# EAGLE board design (EAGLE 6.5.0)
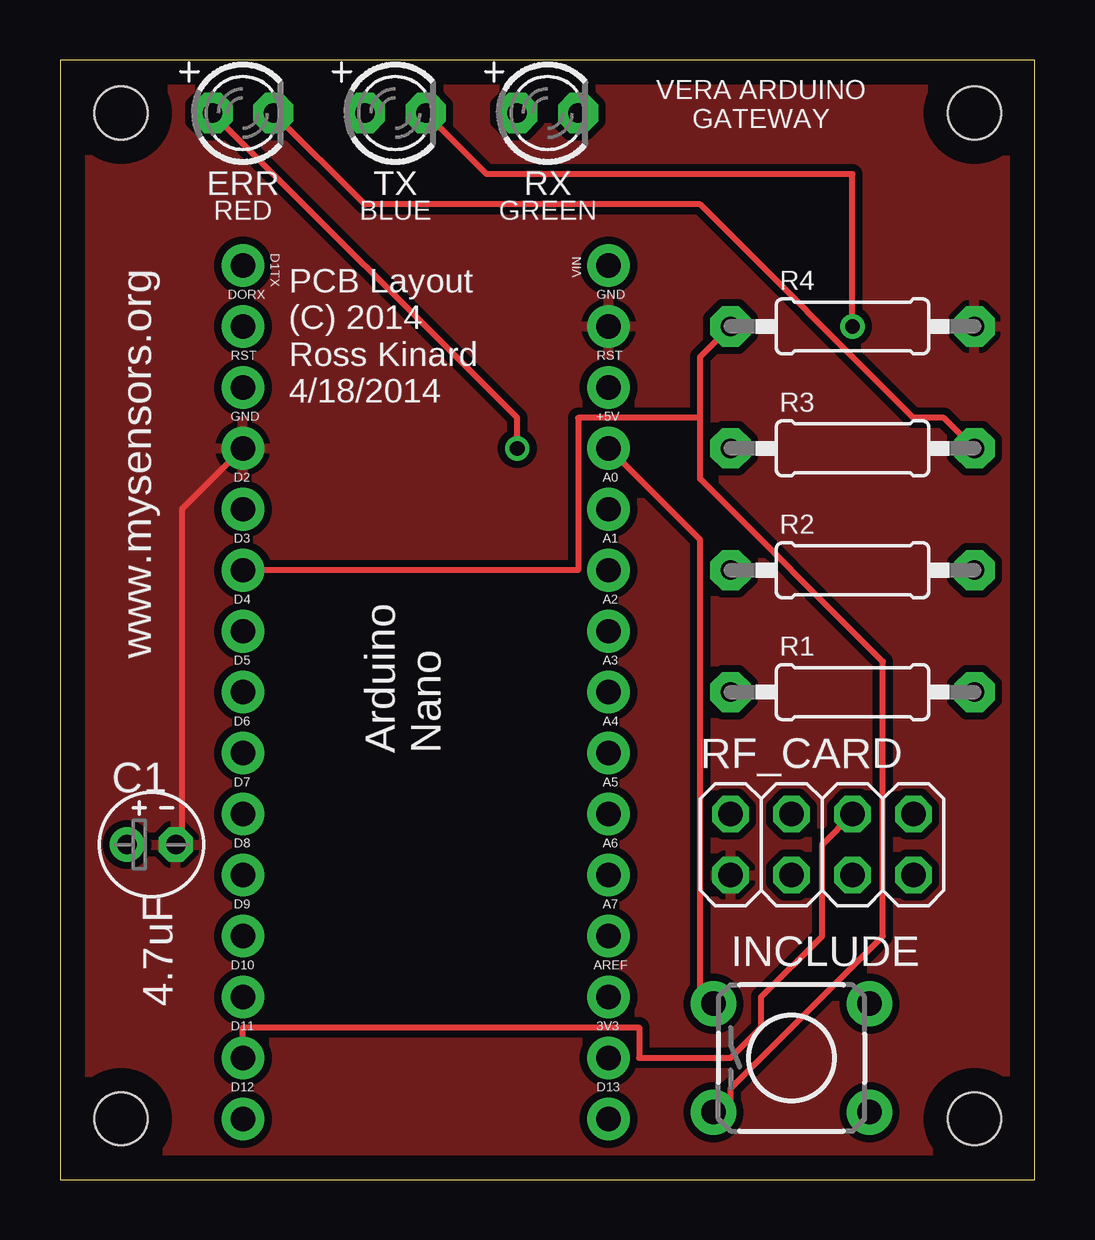
[diagram p0: board, top side]
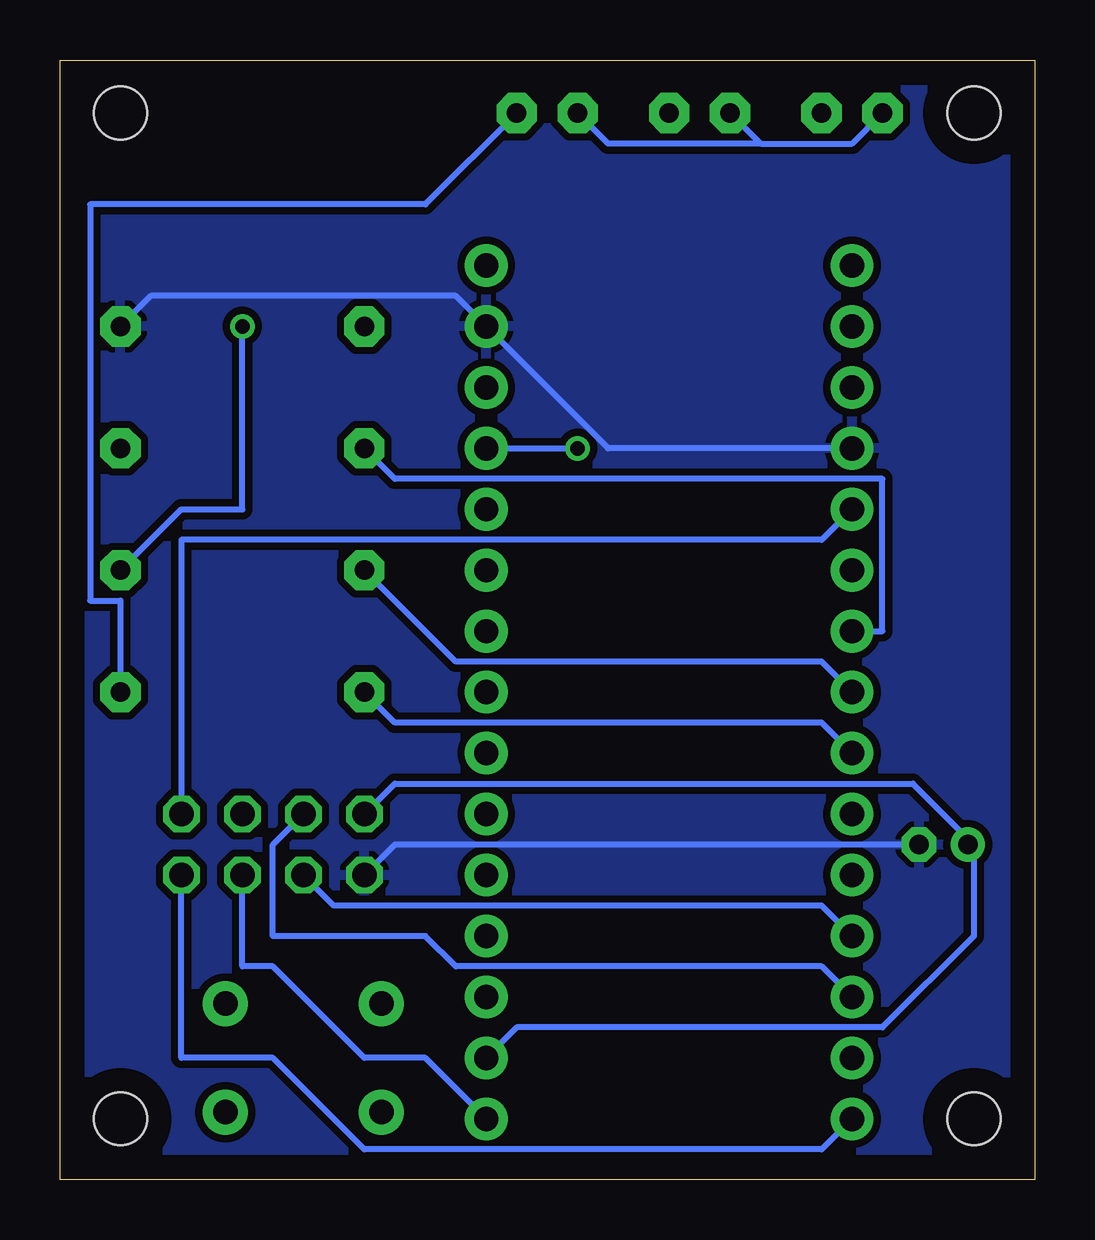
[diagram p1: board, bottom side, seen from below]

Size 40.62 x 46.66 mm. Coordinates in mm from the lower left corner, seen from the top.
Outline: 0,0 40.62,0 40.62,46.66 0,46.66 0,0
Copper layers (1*16): Top 0.035mm / dielectric 1.5mm / Bottom 0.035mm
Design rules "default": minimum track width 10mil, minimum drill 24mil, track to track 8mil, track to pad 8mil, pad to pad 8mil, via to via 8mil, smd to smd 8mil, copper to edge 40mil, drill to drill 8mil, minimum pad ring 10mil, minimum via ring 8mil, stop-mask expansion 4mil, vias tented up to drill 0mil, thermal gap 10mil
Holes 2.2 mm at 2.54,2.54 38.1,2.54 38.1,44.45 2.54,44.45

## Footprints (pad centres in the part's own frame; a part is rotated, then mirrored left to right if it is on the bottom)
E2-4 = drill 0.813 pad 1.422: + -1.016,0 | drill 0.813 pad 1.422 octagon: - 1.016,0
LED3MM = drill 0.813 pad 1.676 octagon: A -1.27,0; K 1.27,0
TACTILE-PTH = drill 1.016 pad 1.88: 1 -3.251,2.261; 2 3.251,2.261; 3 -3.251,-2.261; 4 3.251,-2.261
ARDUINO_NANO = drill 1.016 pad 1.778: 3V3 6.35,1.27; 5V 31.75,1.27; A0 11.43,1.27; A1 13.97,1.27; A2 16.51,1.27; A3 19.05,1.27; A4 21.59,1.27; A5 24.13,1.27; A6 26.67,1.27; A7 29.21,1.27; D2 29.21,16.51; D3 26.67,16.51; D4 24.13,16.51; D5 21.59,16.51; D6 19.05,16.51; D7 16.51,16.51; D8 13.97,16.51; D9 11.43,16.51; D10 8.89,16.51; D11 6.35,16.51; D12 3.81,16.51; D13 3.81,1.27; GND 31.75,16.51; GND. 36.83,1.27; REF 8.89,1.27; RST 34.29,16.51; RST. 34.29,1.27; RX1 36.83,16.51; TX1 39.37,16.51; VIN 39.37,1.27
0207/10 = drill 0.813 pad 1.676 octagon: 1 -5.08,0; 2 5.08,0
2X04 = drill 1.016 octagon: 1 -3.81,-1.27; 2 -3.81,1.27; 3 -1.27,-1.27; 4 -1.27,1.27; 5 1.27,-1.27; 6 1.27,1.27; 7 3.81,-1.27; 8 3.81,1.27

## Placement (x,y rotation side)
C1  4.7uF  [E2-4]  3.81,13.97 0 top
ERR  [LED3MM]  7.62,44.45 0 top
INCLUDE  SWITCH-MOMENTARY-2PTH  [TACTILE-PTH]  30.48,5.08 0 top
PCB1  ARDUINO_NANO  [ARDUINO_NANO]  24.13,-1.27 90 top
R1  220  [0207/10]  33.02,20.32 0 top
R2  470  [0207/10]  33.02,25.4 0 top
R3  220  [0207/10]  33.02,30.48 0 top
R4  10K  [0207/10]  33.02,35.56 0 top
RF_CARD  [2X04]  31.75,13.97 0 top
RX  [LED3MM]  20.32,44.45 0 top
TX  [LED3MM]  13.97,44.45 0 top

## Library data of the parts
C1 ERR PCB1 RF_CARD RX TX = MyLibrary
INCLUDE = SparkFun-Electromechanical
R1-R4 = adafruit

## Nets
GND: C1.- PCB1.GND PCB1.GND. R4.2 RF_CARD.1
N$1: ERR.A INCLUDE.1 PCB1.5V RX.A TX.A
N$3: INCLUDE.3 PCB1.D3 R4.1
N$4: R1.2 RX.K
N$5: R2.2 TX.K
N$6: ERR.K R3.2
N$7: PCB1.D4 R3.1
N$8: PCB1.D5 R2.1
N$9: PCB1.D6 R1.1
N$11: C1.+ PCB1.3V3 RF_CARD.2
N$12: PCB1.D9 RF_CARD.3
N$13: PCB1.D10 RF_CARD.4
N$14: PCB1.D13 RF_CARD.5
N$15: PCB1.D11 RF_CARD.6
N$16: PCB1.D12 RF_CARD.7
N$17: PCB1.D2 RF_CARD.8

## Tracks (layer width: path | path; a pad name or v marks a point on that pad's centre or on a via)
GND
  Top 0.254: PCB1.GND 5.08,27.94 5.08,13.97 C1.-
  Bottom 0.254: R4.2 36.83,36.83 24.13,36.83 PCB1.GND. 17.78,30.48 PCB1.GND | RF_CARD.1 26.67,13.97 C1.-
  pour Bottom (isolate 0.305): 0,46.99 40.64,46.99 40.64,0 0,0
  pour Top (isolate 0.305): 0,46.99 40.64,46.99 40.64,0 0,0
N$1  (via drill 0.61)
  Top 0.254: PCB1.5V 26.67,26.67 26.67,7.62 INCLUDE.1 | ERR.A 19.05,31.75 v19.05,30.48
  Bottom 0.254: ERR.A 7.62,43.18 11.43,43.18 | TX.A 11.43,43.18 | RX.A 17.78,43.18 11.43,43.18 | PCB1.5V v19.05,30.48
N$3
  Top 0.254: R4.1 26.67,34.29 26.67,31.75 | 26.67,31.75 26.67,29.21 34.29,21.59 34.29,10.16 27.94,3.81 27.94,2.54 INCLUDE.3 | PCB1.D3 21.59,25.4 21.59,31.75 26.67,31.75
N$4
  Bottom 0.254: R1.2 38.1,24.13 39.37,24.13 39.37,40.64 25.4,40.64 RX.K
N$5  (via drill 0.61)
  Top 0.254: TX.K 17.78,41.91 33.02,41.91 v33.02,35.56
  Bottom 0.254: v33.02,35.56 33.02,27.94 35.56,27.94 R2.2
N$6
  Top 0.254: ERR.K 12.7,40.64 26.67,40.64 35.56,31.75 36.83,31.75 R3.2
N$7
  Bottom 0.254: R3.1 26.67,29.21 6.35,29.21 6.35,22.86 PCB1.D4
N$8
  Bottom 0.254: R2.1 24.13,21.59 8.89,21.59 PCB1.D5
N$9
  Bottom 0.254: R1.1 26.67,19.05 8.89,19.05 PCB1.D6
N$11
  Bottom 0.254: 2.54,13.97 5.08,16.51 26.67,16.51 RF_CARD.2 | PCB1.3V3 21.59,6.35 6.35,6.35 2.54,10.16 2.54,13.97 | 2.54,13.97 C1.+
N$12
  Bottom 0.254: RF_CARD.3 29.21,11.43 8.89,11.43 PCB1.D9
N$13
  Bottom 0.254: RF_CARD.4 31.75,13.97 31.75,10.16 25.4,10.16 24.13,8.89 8.89,8.89 PCB1.D10
N$14
  Bottom 0.254: RF_CARD.5 33.02,8.89 31.75,8.89 27.94,5.08 25.4,5.08 PCB1.D13
N$15
  Top 0.254: RF_CARD.6 31.75,13.97 31.75,10.16 29.21,7.62 29.21,6.35 27.94,5.08 24.13,5.08 24.13,6.35 7.62,6.35 PCB1.D11
N$16
  Bottom 0.254: RF_CARD.7 35.56,5.08 31.75,5.08 27.94,1.27 8.89,1.27 PCB1.D12
N$17
  Bottom 0.254: RF_CARD.8 35.56,26.67 8.89,26.67 PCB1.D2

## Text on the board
tNames: VERA ARDUINO / GATEWAY | RED | BLUE | GREEN | PCB Layout / (C) 2014 / Ross Kinard / 4/18/2014 | www.mysensors.org